# EAGLE board CC_LM311 (EAGLE 7.2.0)
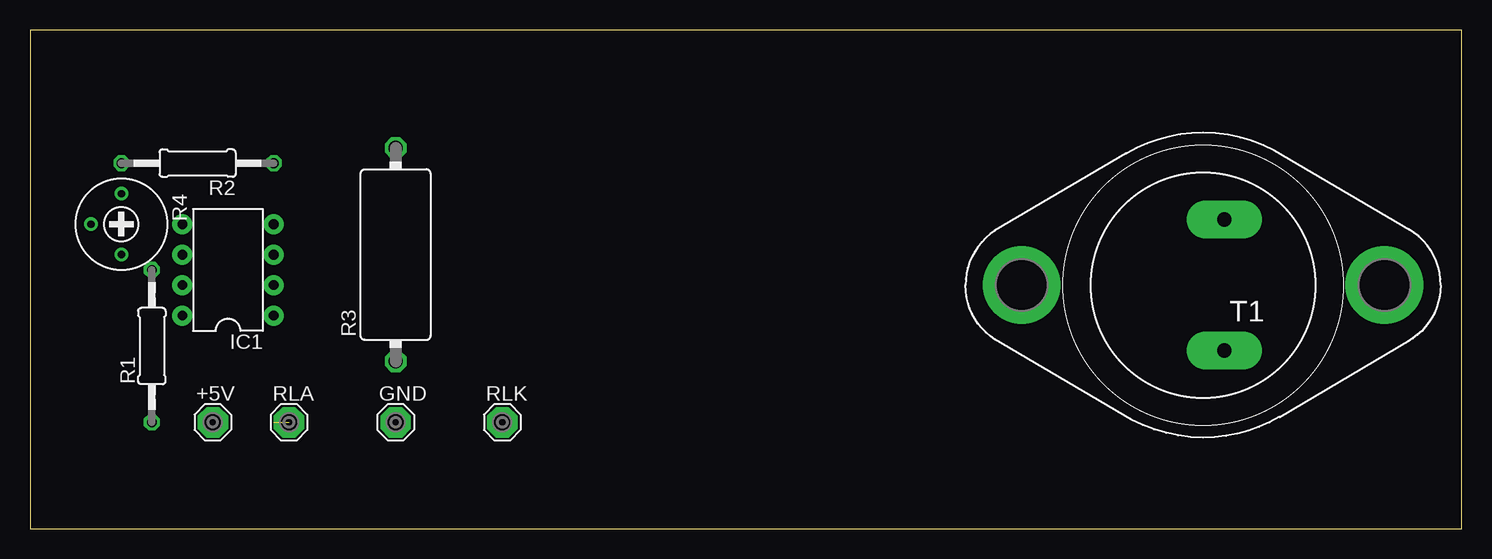
[diagram p0: board, top side]
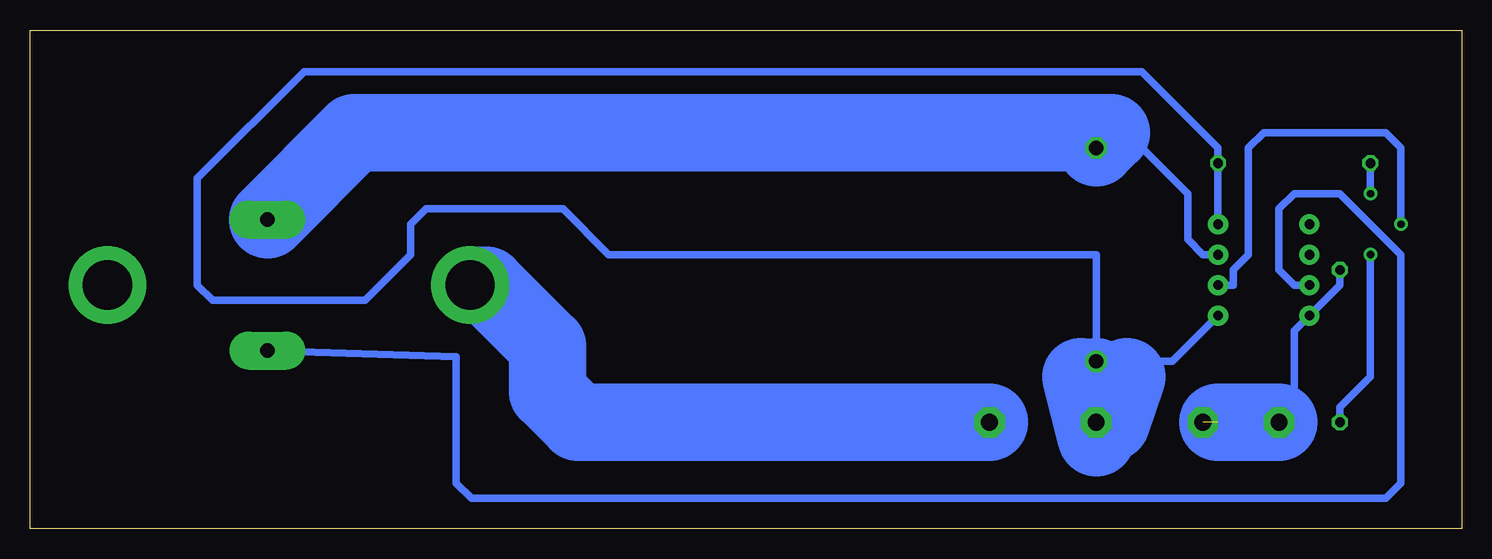
[diagram p1: board, bottom side, seen from below]

Size 119.36 x 41.58 mm. Coordinates in mm from the lower left corner, seen from the top.
Outline: 0,0 119.36,0 119.36,41.58 0,41.58 0,0
Copper layers (1*16): Top 0.035mm / dielectric 1.5mm / Bottom 0.035mm
Design rules "default": minimum track width 10mil, minimum drill 24mil, track to track 8mil, track to pad 8mil, pad to pad 8mil, via to via 8mil, smd to smd 8mil, copper to edge 40mil, drill to drill 8mil, minimum pad ring 10mil, minimum via ring 8mil, stop-mask expansion 4mil, vias tented up to drill 0mil, thermal gap 10mil

## Footprints (pad centres in the part's own frame; a part is rotated, then mirrored left to right if it is on the bottom)
SE14 = drill 1.397 pad 2.54 octagon: MP 0,0
DIL08 = drill 0.813 pad 1.676: 1 -3.81,-3.81; 2 -1.27,-3.81; 3 1.27,-3.81; 4 3.81,-3.81; 5 3.81,3.81; 6 1.27,3.81; 7 -1.27,3.81; 8 -3.81,3.81
0207/12 = drill 0.813 octagon: 1 -6.35,0; 2 6.35,0
V235/17 = drill 1.194 octagon: 1 -8.89,0; 2 8.89,0
RTRIM3339P = drill 0.61: 1 -2.54,0; 2 0,-2.54; 3 2.54,0
TO3 = drill 1.194 pad 3.15 long: B -1.778,5.461; E -1.778,-5.461 | drill 4.115 pad 6.477: C 15.113,0; C/ -15.113,0

## Placement (x,y rotation side)
+5V  SE14  [SE14]  15.24,8.89 0 top
GND  SE14  [SE14]  30.48,8.89 0 top
IC1  LM311N  [DIL08]  16.51,21.59 90 top
R1  3K9  [0207/12]  10.16,15.24 90 top
R2  100  [0207/12]  13.97,30.48 180 top
R3  0R1 10W  [V235/17]  30.48,22.86 90 top
R4  1K  [RTRIM3339P]  7.62,25.4 270 top
RLA  SE14  [SE14]  21.59,8.89 0 top
RLK  SE14  [SE14]  39.37,8.89 0 top
T1  2N3055  [TO3]  97.79,20.32 180 top

## Library data of the parts
+5V GND RLA RLK = solpad
IC1 = linear
R1 R2 R4 = resistor
R3 = rcl
T1 = transistor

## Nets
N$1: +5V.MP IC1.8 R1.2 RLA.MP
N$2: R1.1 R4.3
N$3: R2.2 R4.1
N$4: GND.MP IC1.1 IC1.4 R2.1 R3.1
N$5: IC1.3 R3.2 T1.E
N$6: IC1.7 T1.B
N$7: RLK.MP T1.C T1.C/
N$8: IC1.2 R4.2

## Tracks (layer width: path | path; a pad name or v marks a point on that pad's centre or on a via)
N$1  (1 unrouted)
  Bottom 0.61: R1.2 10.16,20.32 IC1.8 13.97,16.51 13.97,10.16 +5V.MP
  Bottom 6.452: +5V.MP 20.32,8.89
N$2
  Bottom 0.61: R1.1 10.16,10.16 7.62,12.7 R4.3
N$3
  Bottom 0.61: R4.1 R2.2
N$4
  Bottom 0.61: IC1.1 24.13,13.97 R3.1 | R3.1 30.48,12.7 | IC1.4 R2.1 20.32,31.75 26.67,38.1 96.52,38.1 105.41,29.21 105.41,20.32 104.14,19.05 91.44,19.05 87.63,22.86 87.63,25.4 86.36,26.67 74.93,26.67 71.12,22.86 30.48,22.86 R3.1
  Bottom 6.452: GND.MP 30.48,12.7
N$5
  Bottom 0.61: R3.2 26.67,31.75 22.86,27.94 22.86,24.13 21.59,22.86 IC1.3
  Bottom 6.452: T1.E 92.33,33.02 29.21,33.02 R3.2
N$6
  Bottom 0.61: T1.B 83.82,14.35 83.82,3.81 82.55,2.54 6.35,2.54 5.08,3.81 5.08,22.86 10.16,27.94 13.97,27.94 15.24,26.67 15.24,21.59 13.97,20.32 IC1.7
N$7
  Bottom 6.452: RLK.MP 73.66,8.89 76.2,11.43 76.2,15.24 81.28,20.32 T1.C
N$8
  Bottom 0.61: R4.2 5.08,31.75 6.35,33.02 16.51,33.02 17.78,31.75 17.78,22.86 19.05,21.59 19.05,20.32 IC1.2
N$10
  Bottom 6.452: 27.94,12.7 29.21,8.89
N$11
  Bottom 6.452: 30.48,7.62 31.75,12.7